# Altium PCB 1_ir-tara-f.PcbDoc (part 3 of 8)
Units mm, origin at the board's own origin, x right, y up, seen from the top; angles counter-clockwise.
Board outline 151 x 86.38 mm, 2 copper layers (Top Layer, Bottom Layer); 728 components, 20 nets, 2100 pads, 0 vias.
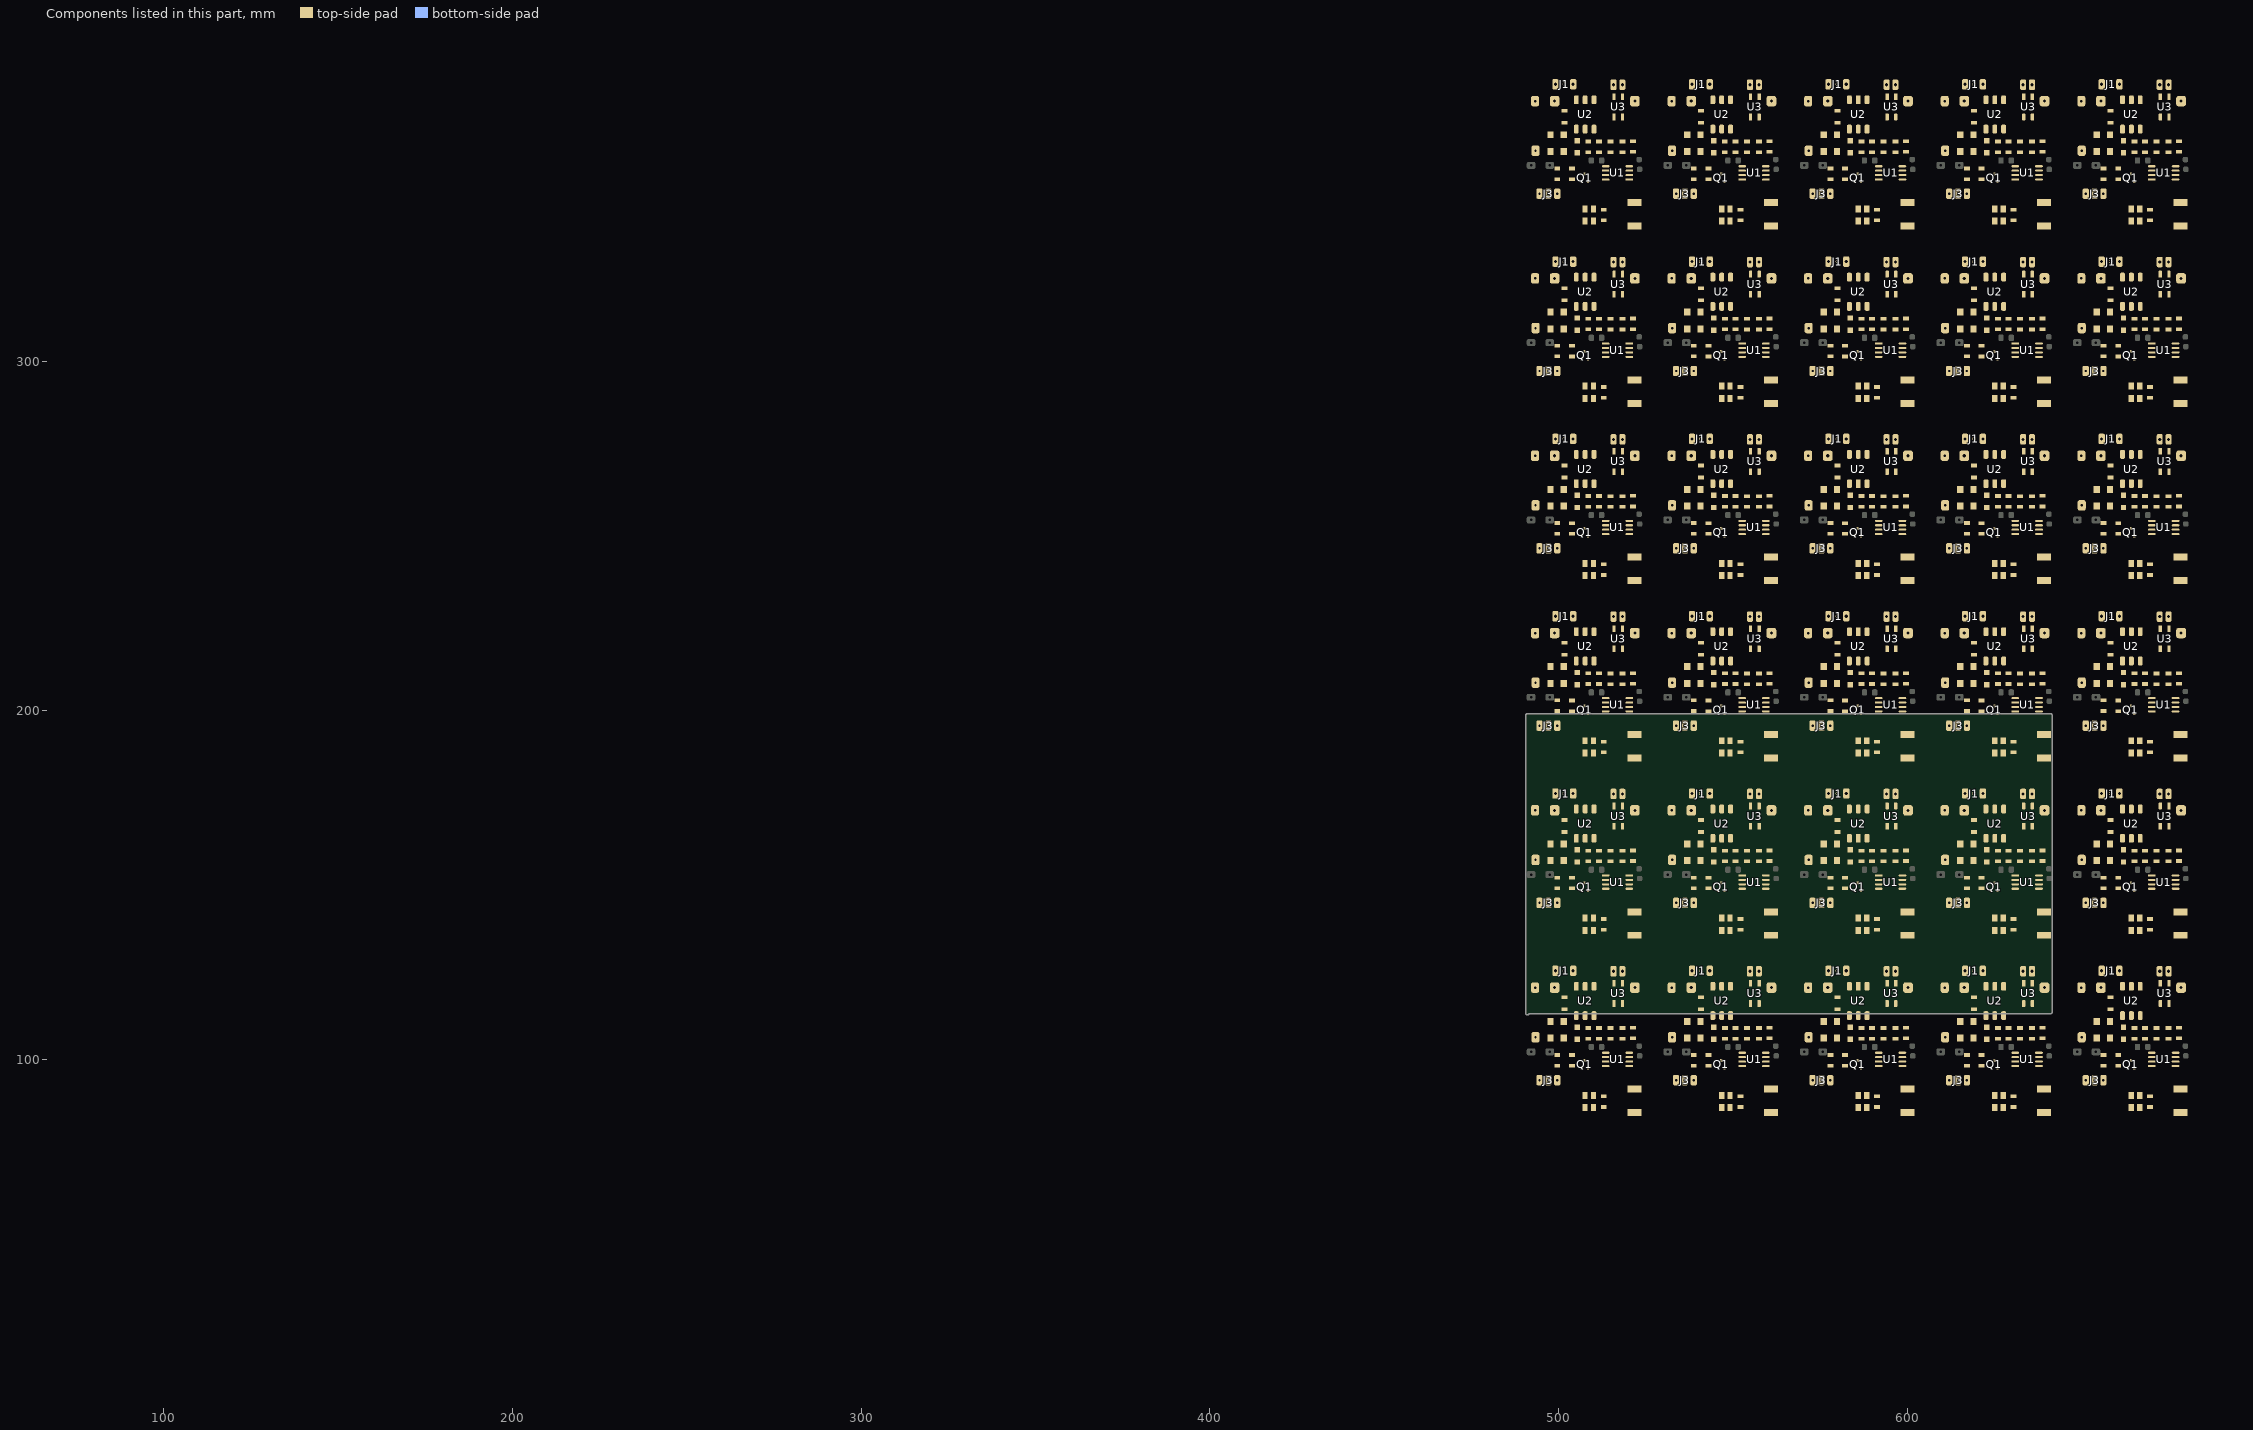
[diagram p3: the components of this part, seen from the top]

## Nets (pads, with @x,y where several pads share a name; then routed paths per layer and width w, separated by ;. In a path a pad name is that pad's centre, name@x,y a point inside that pad or via, vN(x,y) a via of type N, cw(c..) or ccw(c..) an arc to the next point about the centre after c; other vN are vias at no path point) (continued)
pads on no net: C1.1@521.846,120.588 C1.1@521.846,171.426 C1.1@521.846,222.265 C1.1@521.846,273.104 C1.1@521.846,323.942 C1.1@521.846,374.781 C1.1@561,120.588 C1.1@561,171.426 C1.1@561,222.265 C1.1@561,273.104 C1.1@561,323.942 C1.1@561,374.781 C1.1@600.155,120.588 C1.1@600.155,222.265 C1.1@600.155,273.104 C1.1@600.155,323.942 C1.1@600.155,374.781 C1.1@639.31,120.588 C1.1@639.31,171.426 C1.1@639.31,222.265 C1.1@639.31,273.104 C1.1@639.31,323.942 C1.1@639.31,374.781 C1.1@678.464,120.588 C1.1@678.464,171.426 C1.1@678.464,222.265 C1.1@678.464,273.104 C1.1@678.464,323.942 C1.1@678.464,374.781 C1.2@498.846,120.588 C1.2@498.846,171.426 C1.2@498.846,222.265 C1.2@498.846,273.104 C1.2@498.846,323.942 C1.2@498.846,374.781 C1.2@538,120.588 C1.2@538,171.426 C1.2@538,222.265 C1.2@538,273.104 C1.2@538,323.942 C1.2@538,374.781 C1.2@577.155,120.588 C1.2@577.155,222.265 C1.2@577.155,273.104 C1.2@577.155,323.942 C1.2@577.155,374.781 C1.2@616.31,120.588 C1.2@616.31,171.426 C1.2@616.31,222.265 C1.2@616.31,273.104 C1.2@616.31,323.942 C1.2@616.31,374.781 C1.2@655.464,120.588 C1.2@655.464,171.426 C1.2@655.464,222.265 C1.2@655.464,273.104 C1.2@655.464,323.942 C1.2@655.464,374.781 C2.1@508.477,105.974 C2.1@508.477,156.812 C2.1@508.477,207.651 C2.1@508.477,258.49 C2.1@508.477,309.328 C2.1@508.477,360.167 C2.1@547.631,105.974 C2.1@547.631,156.812 C2.1@547.631,207.651 C2.1@547.631,258.49 C2.1@547.631,309.328 C2.1@547.631,360.167 C2.1@586.786,105.974 C2.1@586.786,207.651 C2.1@586.786,258.49 C2.1@586.786,309.328 C2.1@586.786,360.167 C2.1@625.941,105.974 C2.1@625.941,156.812 C2.1@625.941,207.651 C2.1@625.941,258.49 C2.1@625.941,309.328 C2.1@625.941,360.167 C2.1@665.095,105.974 C2.1@665.095,156.812 C2.1@665.095,207.651 C2.1@665.095,258.49 C2.1@665.095,309.328 C2.1@665.095,360.167 C2.2@508.477,109.023 C2.2@508.477,159.862 C2.2@508.477,210.701 C2.2@508.477,261.539 C2.2@508.477,312.378 C2.2@508.477,363.216 C2.2@547.631,109.023 C2.2@547.631,159.862 C2.2@547.631,210.701 C2.2@547.631,261.539 C2.2@547.631,312.378 C2.2@547.631,363.216 C2.2@586.786,109.023 C2.2@586.786,210.701 C2.2@586.786,261.539 C2.2@586.786,312.378 C2.2@586.786,363.216 C2.2@625.941,109.023 C2.2@625.941,159.862 C2.2@625.941,210.701 C2.2@625.941,261.539 C2.2@625.941,312.378 C2.2@625.941,363.216 C2.2@665.095,109.023 C2.2@665.095,159.862 C2.2@665.095,210.701 C2.2@665.095,261.539 C2.2@665.095,312.378 C2.2@665.095,363.216 C3.1@511.525,105.974 C3.1@511.525,156.812 C3.1@511.525,207.651 C3.1@511.525,258.49 C3.1@511.525,309.328 C3.1@511.525,360.167 C3.1@550.679,105.974 C3.1@550.679,156.812 C3.1@550.679,207.651 C3.1@550.679,258.49 C3.1@550.679,309.328 C3.1@550.679,360.167 C3.1@589.834,105.974 C3.1@589.834,207.651 C3.1@589.834,258.49 C3.1@589.834,309.328 C3.1@589.834,360.167 C3.1@628.989,105.974 C3.1@628.989,156.812 C3.1@628.989,207.651 C3.1@628.989,258.49 C3.1@628.989,309.328 C3.1@628.989,360.167 C3.1@668.143,105.974 C3.1@668.143,156.812 C3.1@668.143,207.651 C3.1@668.143,258.49 C3.1@668.143,309.328 C3.1@668.143,360.167 C3.2@511.525,109.024 C3.2@511.525,159.862 C3.2@511.525,210.701 C3.2@511.525,261.54 C3.2@511.525,312.378 C3.2@511.525,363.217 C3.2@550.679,109.024 C3.2@550.679,159.862 C3.2@550.679,210.701 C3.2@550.679,261.54 C3.2@550.679,312.378 C3.2@550.679,363.217 C3.2@589.834,109.024 C3.2@589.834,210.701 C3.2@589.834,261.54 C3.2@589.834,312.378 C3.2@589.834,363.217 C3.2@628.989,109.024 C3.2@628.989,159.862 C3.2@628.989,210.701 C3.2@628.989,261.54 C3.2@628.989,312.378 C3.2@628.989,363.217 C3.2@668.143,109.024 C3.2@668.143,159.862 C3.2@668.143,210.701 C3.2@668.143,261.54 C3.2@668.143,312.378 C3.2@668.143,363.217 C4.1@521.304,109.094 C4.1@521.304,159.933 C4.1@521.304,210.772 C4.1@521.304,261.61 C4.1@521.304,312.449 C4.1@521.304,363.287 C4.1@560.458,109.094 C4.1@560.458,159.933 C4.1@560.458,210.772 C4.1@560.458,261.61 C4.1@560.458,312.449 C4.1@560.458,363.287 C4.1@599.613,109.094 C4.1@599.613,210.772 C4.1@599.613,261.61 C4.1@599.613,312.449 C4.1@599.613,363.287 C4.1@638.768,109.094 C4.1@638.768,159.933 C4.1@638.768,210.772 C4.1@638.768,261.61 C4.1@638.768,312.449 C4.1@638.768,363.287 C4.1@677.922,109.094 C4.1@677.922,159.933 C4.1@677.922,210.772 C4.1@677.922,261.61 C4.1@677.922,312.449 C4.1@677.922,363.287 C4.2@521.304,106.045 C4.2@521.304,156.883 C4.2@521.304,207.722 C4.2@521.304,258.561 C4.2@521.304,309.399 C4.2@521.304,360.238 C4.2@560.458,106.045 C4.2@560.458,156.883 C4.2@560.458,207.722 C4.2@560.458,258.561 C4.2@560.458,309.399 C4.2@560.458,360.238 C4.2@599.613,106.045 C4.2@599.613,207.722 C4.2@599.613,258.561 C4.2@599.613,309.399 C4.2@599.613,360.238 C4.2@638.768,106.045 C4.2@638.768,156.883 C4.2@638.768,207.722 C4.2@638.768,258.561 C4.2@638.768,309.399 C4.2@638.768,360.238 C4.2@677.922,106.045 C4.2@677.922,156.883 C4.2@677.922,207.722 C4.2@677.922,258.561 C4.2@677.922,309.399 C4.2@677.922,360.238 D1.1@507.588,89.699 D1.1@507.588,140.537 D1.1@507.588,191.376 D1.1@507.588,242.215 D1.1@507.588,293.053 D1.1@507.588,343.892 D1.1@546.742,89.699 D1.1@546.742,140.537 D1.1@546.742,191.376 D1.1@546.742,242.215 D1.1@546.742,293.053 D1.1@546.742,343.892 D1.1@585.897,89.699 D1.1@585.897,191.376 D1.1@585.897,242.215 D1.1@585.897,293.053 D1.1@585.897,343.892 D1.1@625.052,89.699 D1.1@625.052,140.537 D1.1@625.052,191.376 D1.1@625.052,242.215 D1.1@625.052,293.053 D1.1@625.052,343.892 D1.1@664.206,89.699 D1.1@664.206,140.537 D1.1@664.206,191.376 D1.1@664.206,242.215 D1.1@664.206,293.053 D1.1@664.206,343.892 D1.2@507.588,86.199 D1.2@507.588,137.037 D1.2@507.588,187.876 D1.2@507.588,238.715 D1.2@507.588,289.553 D1.2@507.588,340.392 D1.2@546.742,86.199 D1.2@546.742,137.037 D1.2@546.742,187.876 D1.2@546.742,238.715 D1.2@546.742,289.553 D1.2@546.742,340.392 D1.2@585.897,86.199 D1.2@585.897,187.876 D1.2@585.897,238.715 D1.2@585.897,289.553 D1.2@585.897,340.392 D1.2@625.052,86.199 D1.2@625.052,137.037 D1.2@625.052,187.876 D1.2@625.052,238.715 D1.2@625.052,289.553 D1.2@625.052,340.392 D1.2@664.206,86.199 D1.2@664.206,137.037 D1.2@664.206,187.876 D1.2@664.206,238.715 D1.2@664.206,289.553 D1.2@664.206,340.392 D2.1@510.001,89.699 D2.1@510.001,140.537 D2.1@510.001,191.376 D2.1@510.001,242.215 D2.1@510.001,293.053 D2.1@510.001,343.892 D2.1@549.155,89.699 D2.1@549.155,140.537 D2.1@549.155,191.376 D2.1@549.155,242.215 D2.1@549.155,293.053 D2.1@549.155,343.892 D2.1@588.31,89.699 D2.1@588.31,191.376 D2.1@588.31,242.215 D2.1@588.31,293.053 D2.1@588.31,343.892 D2.1@627.465,89.699 D2.1@627.465,140.537 D2.1@627.465,191.376 D2.1@627.465,242.215 D2.1@627.465,293.053 D2.1@627.465,343.892 D2.1@666.619,89.699 D2.1@666.619,140.537 D2.1@666.619,191.376 D2.1@666.619,242.215 D2.1@666.619,293.053 D2.1@666.619,343.892 D2.2@510.001,86.199 D2.2@510.001,137.037 D2.2@510.001,187.876 D2.2@510.001,238.715 D2.2@510.001,289.553 D2.2@510.001,340.392 D2.2@549.155,86.199 D2.2@549.155,137.037 D2.2@549.155,187.876 D2.2@549.155,238.715 D2.2@549.155,289.553 D2.2@549.155,340.392 D2.2@588.31,86.199 D2.2@588.31,187.876 D2.2@588.31,238.715 D2.2@588.31,289.553 D2.2@588.31,340.392 D2.2@627.465,86.199 D2.2@627.465,137.037 D2.2@627.465,187.876 D2.2@627.465,238.715 D2.2@627.465,289.553 D2.2@627.465,340.392 D2.2@666.619,86.199 D2.2@666.619,137.037 D2.2@666.619,187.876 D2.2@666.619,238.715 D2.2@666.619,289.553 D2.2@666.619,340.392 D3.1@501.492,110.946 D3.1@501.492,161.784 D3.1@501.492,212.623 D3.1@501.492,263.462 D3.1@501.492,314.3 D3.1@501.492,365.139 D3.1@540.646,110.946 D3.1@540.646,161.784 D3.1@540.646,212.623 D3.1@540.646,263.462 D3.1@540.646,314.3 D3.1@540.646,365.139 D3.1@579.801,110.946 D3.1@579.801,212.623 D3.1@579.801,263.462 D3.1@579.801,314.3 D3.1@579.801,365.139 D3.1@618.956,110.946 D3.1@618.956,161.784 D3.1@618.956,212.623 D3.1@618.956,263.462 D3.1@618.956,314.3 D3.1@618.956,365.139 D3.1@658.11,110.946 D3.1@658.11,161.784 D3.1@658.11,212.623 D3.1@658.11,263.462 D3.1@658.11,314.3 D3.1@658.11,365.139 D3.2@501.492,106.146 D3.2@501.492,156.984 D3.2@501.492,207.823 D3.2@501.492,258.662 D3.2@501.492,309.5 D3.2@501.492,360.339 D3.2@540.646,106.146 D3.2@540.646,156.984 D3.2@540.646,207.823 D3.2@540.646,258.662 D3.2@540.646,309.5 D3.2@540.646,360.339 D3.2@579.801,106.146 D3.2@579.801,207.823 D3.2@579.801,258.662 D3.2@579.801,309.5 D3.2@579.801,360.339 D3.2@618.956,106.146 D3.2@618.956,156.984 D3.2@618.956,207.823 D3.2@618.956,258.662 D3.2@618.956,309.5 D3.2@618.956,360.339 D3.2@658.11,106.146 D3.2@658.11,156.984 D3.2@658.11,207.823 D3.2@658.11,258.662 D3.2@658.11,309.5 D3.2@658.11,360.339 D4.1@497.682,110.946 D4.1@497.682,161.784 D4.1@497.682,212.623 D4.1@497.682,263.462 D4.1@497.682,314.3 D4.1@497.682,365.139 D4.1@536.836,110.946 D4.1@536.836,161.784 D4.1@536.836,212.623 D4.1@536.836,263.462 D4.1@536.836,314.3 D4.1@536.836,365.139 D4.1@575.991,110.946 D4.1@575.991,212.623 D4.1@575.991,263.462 D4.1@575.991,314.3 D4.1@575.991,365.139 D4.1@615.146,110.946 D4.1@615.146,161.784 D4.1@615.146,212.623 D4.1@615.146,263.462 D4.1@615.146,314.3 D4.1@615.146,365.139 D4.1@654.3,110.946 D4.1@654.3,161.784 D4.1@654.3,212.623 D4.1@654.3,263.462 D4.1@654.3,314.3 D4.1@654.3,365.139 D4.2@497.682,106.146 D4.2@497.682,156.984 D4.2@497.682,207.823 D4.2@497.682,258.662 D4.2@497.682,309.5 D4.2@497.682,360.339 D4.2@536.836,106.146 D4.2@536.836,156.984 D4.2@536.836,207.823 D4.2@536.836,258.662 D4.2@536.836,309.5 D4.2@536.836,360.339 D4.2@575.991,106.146 D4.2@575.991,207.823 D4.2@575.991,258.662 D4.2@575.991,309.5 D4.2@575.991,360.339 D4.2@615.146,106.146 D4.2@615.146,156.984 D4.2@615.146,207.823 D4.2@615.146,258.662 D4.2@615.146,309.5 D4.2@615.146,360.339 D4.2@654.3,106.146 D4.2@654.3,156.984 D4.2@654.3,207.823 D4.2@654.3,258.662 D4.2@654.3,309.5 D4.2@654.3,360.339 D5.1@505.302,109.257 D5.1@505.302,160.095 D5.1@505.302,210.934 D5.1@505.302,261.773 D5.1@505.302,312.611 D5.1@505.302,363.45 D5.1@544.456,109.257 D5.1@544.456,160.095 D5.1@544.456,210.934 D5.1@544.456,261.773 D5.1@544.456,312.611 D5.1@544.456,363.45 D5.1@583.611,109.257 D5.1@583.611,210.934 D5.1@583.611,261.773 D5.1@583.611,312.611 D5.1@583.611,363.45 D5.1@622.766,109.257 D5.1@622.766,160.095 D5.1@622.766,210.934 D5.1@622.766,261.773 D5.1@622.766,312.611 D5.1@622.766,363.45 D5.1@661.92,109.257 D5.1@661.92,160.095 D5.1@661.92,210.934 D5.1@661.92,261.773 D5.1@661.92,312.611 D5.1@661.92,363.45 D5.2@505.302,105.757 D5.2@505.302,156.595 D5.2@505.302,207.434 D5.2@505.302,258.273 D5.2@505.302,309.111 D5.2@505.302,359.95 D5.2@544.456,105.757 D5.2@544.456,156.595 D5.2@544.456,207.434 D5.2@544.456,258.273 D5.2@544.456,309.111 D5.2@544.456,359.95 D5.2@583.611,105.757 D5.2@583.611,207.434 D5.2@583.611,258.273 D5.2@583.611,309.111 D5.2@583.611,359.95 D5.2@622.766,105.757 D5.2@622.766,156.595 D5.2@622.766,207.434 D5.2@622.766,258.273 D5.2@622.766,309.111 D5.2@622.766,359.95 D5.2@661.92,105.757 D5.2@661.92,156.595 D5.2@661.92,207.434 D5.2@661.92,258.273 D5.2@661.92,309.111 D5.2@661.92,359.95 D6.1@521.685,84.774 D6.1@521.685,135.612 D6.1@521.685,186.451 D6.1@521.685,237.29 D6.1@521.685,288.128 D6.1@521.685,338.967 D6.1@560.839,84.774 D6.1@560.839,135.612 D6.1@560.839,186.451 D6.1@560.839,237.29 D6.1@560.839,288.128 D6.1@560.839,338.967 D6.1@599.994,84.774 D6.1@599.994,186.451 D6.1@599.994,237.29 D6.1@599.994,288.128 D6.1@599.994,338.967 D6.1@639.149,84.774 D6.1@639.149,135.612 D6.1@639.149,186.451 D6.1@639.149,237.29 D6.1@639.149,288.128 D6.1@639.149,338.967 D6.1@678.303,84.774 D6.1@678.303,135.612 D6.1@678.303,186.451 D6.1@678.303,237.29 D6.1@678.303,288.128 D6.1@678.303,338.967 D6.2@521.685,91.505 D6.2@521.685,142.343 D6.2@521.685,193.182 D6.2@521.685,244.021 D6.2@521.685,294.859 D6.2@521.685,345.698 D6.2@560.839,91.505 D6.2@560.839,142.343 D6.2@560.839,193.182 D6.2@560.839,244.021 D6.2@560.839,294.859 D6.2@560.839,345.698 D6.2@599.994,91.505 D6.2@599.994,193.182 D6.2@599.994,244.021 D6.2@599.994,294.859 D6.2@599.994,345.698 D6.2@639.149,91.505 D6.2@639.149,142.343 D6.2@639.149,193.182 D6.2@639.149,244.021 D6.2@639.149,294.859 D6.2@639.149,345.698 D6.2@678.303,91.505 D6.2@678.303,142.343 D6.2@678.303,193.182 D6.2@678.303,244.021 D6.2@678.303,294.859 D6.2@678.303,345.698 J1.1@499.079,125.414 J1.1@499.079,176.252 J1.1@499.079,227.091 J1.1@499.079,277.93 J1.1@499.079,328.768 J1.1@499.079,379.607 J1.1@538.233,125.414 J1.1@538.233,176.252 J1.1@538.233,227.091 J1.1@538.233,277.93 J1.1@538.233,328.768 J1.1@538.233,379.607 J1.1@577.388,125.414 J1.1@577.388,227.091 J1.1@577.388,277.93 J1.1@577.388,328.768 J1.1@577.388,379.607 J1.1@616.543,125.414 J1.1@616.543,176.252 J1.1@616.543,227.091 J1.1@616.543,277.93 J1.1@616.543,328.768 J1.1@616.543,379.607 J1.1@655.697,125.414 J1.1@655.697,176.252 J1.1@655.697,227.091 J1.1@655.697,277.93 J1.1@655.697,328.768 J1.1@655.697,379.607 J1.2 J1.3@504.159,125.414 J1.3@504.159,176.252 J1.3@504.159,227.091 J1.3@504.159,277.93 J1.3@504.159,328.768 J1.3@504.159,379.607 J1.3@543.313,125.414 J1.3@543.313,176.252 J1.3@543.313,227.091 J1.3@543.313,277.93 J1.3@543.313,328.768 J1.3@543.313,379.607 J1.3@582.468,125.414 J1.3@582.468,227.091 J1.3@582.468,277.93 J1.3@582.468,328.768 J1.3@582.468,379.607 J1.3@621.623,125.414 J1.3@621.623,176.252 J1.3@621.623,227.091 J1.3@621.623,277.93 J1.3@621.623,328.768 J1.3@621.623,379.607 J1.3@660.777,125.414 J1.3@660.777,176.252 J1.3@660.777,227.091 J1.3@660.777,277.93 J1.3@660.777,328.768 J1.3@660.777,379.607 J2.1@515.716,125.287 J2.1@515.716,176.125 J2.1@515.716,226.964 J2.1@515.716,277.803 J2.1@515.716,328.641 J2.1@515.716,379.48 J2.1@554.87,125.287 J2.1@554.87,176.125 J2.1@554.87,226.964 J2.1@554.87,277.803 J2.1@554.87,328.641 J2.1@554.87,379.48 J2.1@594.025,125.287 J2.1@594.025,226.964 J2.1@594.025,277.803 J2.1@594.025,328.641 J2.1@594.025,379.48 J2.1@633.18,125.287 J2.1@633.18,176.125 J2.1@633.18,226.964 J2.1@633.18,277.803 J2.1@633.18,328.641 J2.1@633.18,379.48 J2.1@672.334,125.287 J2.1@672.334,176.125 J2.1@672.334,226.964 J2.1@672.334,277.803 J2.1@672.334,328.641 J2.1@672.334,379.48 J2.2@518.256,125.287 J2.2@518.256,176.125 J2.2@518.256,226.964 J2.2@518.256,277.803 J2.2@518.256,328.641 J2.2@518.256,379.48 J2.2@557.41,125.287 J2.2@557.41,176.125 J2.2@557.41,226.964 J2.2@557.41,277.803 J2.2@557.41,328.641 J2.2@557.41,379.48 J2.2@596.565,125.287 J2.2@596.565,226.964 J2.2@596.565,277.803 J2.2@596.565,328.641 J2.2@596.565,379.48 J2.2@635.72,125.287 J2.2@635.72,176.125 J2.2@635.72,226.964 J2.2@635.72,277.803 J2.2@635.72,328.641 J2.2@635.72,379.48 J2.2@674.874,125.287 J2.2@674.874,176.125 J2.2@674.874,226.964 J2.2@674.874,277.803 J2.2@674.874,328.641 J2.2@674.874,379.48 J3.1@494.507,94.045 J3.1@494.507,144.883 J3.1@494.507,195.722 J3.1@494.507,246.561 J3.1@494.507,297.399 J3.1@494.507,348.238 J3.1@533.661,94.045 J3.1@533.661,144.883 J3.1@533.661,195.722 J3.1@533.661,246.561 J3.1@533.661,297.399 J3.1@533.661,348.238 J3.1@572.816,94.045 J3.1@572.816,195.722 J3.1@572.816,246.561 J3.1@572.816,297.399 J3.1@572.816,348.238 J3.1@611.971,94.045 J3.1@611.971,144.883 J3.1@611.971,195.722 J3.1@611.971,246.561 J3.1@611.971,297.399 J3.1@611.971,348.238 J3.1@651.125,94.045 J3.1@651.125,144.883 J3.1@651.125,195.722 J3.1@651.125,246.561 J3.1@651.125,297.399 J3.1@651.125,348.238 J3.2@497.047,94.045 J3.2@497.047,144.883 J3.2@497.047,195.722 J3.2@497.047,246.561 J3.2@497.047,297.399 J3.2@497.047,348.238 J3.2@536.201,94.045 J3.2@536.201,144.883 J3.2@536.201,195.722 J3.2@536.201,246.561 J3.2@536.201,297.399 J3.2@536.201,348.238 J3.2@575.356,94.045 J3.2@575.356,195.722 J3.2@575.356,246.561 J3.2@575.356,297.399 J3.2@575.356,348.238 J3.2@614.511,94.045 J3.2@614.511,144.883 J3.2@614.511,195.722 J3.2@614.511,246.561 J3.2@614.511,297.399 J3.2@614.511,348.238 J3.2@653.665,94.045 J3.2@653.665,144.883 J3.2@653.665,195.722 J3.2@653.665,246.561 J3.2@653.665,297.399 J3.2@653.665,348.238 J3.3@499.587,94.045 J3.3@499.587,144.883 J3.3@499.587,195.722 J3.3@499.587,246.561 J3.3@499.587,297.399 J3.3@499.587,348.238 J3.3@538.741,94.045 J3.3@538.741,144.883 J3.3@538.741,195.722 J3.3@538.741,246.561 J3.3@538.741,297.399 J3.3@538.741,348.238 J3.3@577.896,94.045 J3.3@577.896,195.722 J3.3@577.896,246.561 J3.3@577.896,297.399 J3.3@577.896,348.238 J3.3@617.051,94.045 J3.3@617.051,144.883 J3.3@617.051,195.722 J3.3@617.051,246.561 J3.3@617.051,297.399 J3.3@617.051,348.238 J3.3@656.205,94.045 J3.3@656.205,144.883 J3.3@656.205,195.722 J3.3@656.205,246.561 J3.3@656.205,297.399 J3.3@656.205,348.238 Q1.1@506.511,97.542 Q1.1@506.511,148.38 Q1.1@506.511,199.219 Q1.1@506.511,250.058 Q1.1@506.511,300.896 Q1.1@506.511,351.735 Q1.1@545.665,97.542 Q1.1@545.665,148.38 Q1.1@545.665,199.219 Q1.1@545.665,250.058 Q1.1@545.665,300.896 Q1.1@545.665,351.735 Q1.1@584.82,97.542 Q1.1@584.82,199.219 Q1.1@584.82,250.058 Q1.1@584.82,300.896 Q1.1@584.82,351.735 Q1.1@623.975,97.542 Q1.1@623.975,148.38 Q1.1@623.975,199.219 Q1.1@623.975,250.058 Q1.1@623.975,300.896 Q1.1@623.975,351.735 Q1.1@663.129,97.542 Q1.1@663.129,148.38 Q1.1@663.129,199.219 Q1.1@663.129,250.058 Q1.1@663.129,300.896 Q1.1@663.129,351.735 Q1.2@508.411,97.542 Q1.2@508.411,148.38 Q1.2@508.411,199.219 Q1.2@508.411,250.058 Q1.2@508.411,300.896 Q1.2@508.411,351.735 Q1.2@547.565,97.542 Q1.2@547.565,148.38 Q1.2@547.565,199.219 Q1.2@547.565,250.058 Q1.2@547.565,300.896 Q1.2@547.565,351.735 Q1.2@586.72,97.542 Q1.2@586.72,199.219 Q1.2@586.72,250.058 Q1.2@586.72,300.896 Q1.2@586.72,351.735 Q1.2@625.875,97.542 Q1.2@625.875,148.38 Q1.2@625.875,199.219 Q1.2@625.875,250.058 Q1.2@625.875,300.896 Q1.2@625.875,351.735 Q1.2@665.029,97.542 Q1.2@665.029,148.38 Q1.2@665.029,199.219 Q1.2@665.029,250.058 Q1.2@665.029,300.896 Q1.2@665.029,351.735 Q1.3@507.461,99.692 Q1.3@507.461,150.53 Q1.3@507.461,201.369 Q1.3@507.461,252.208 Q1.3@507.461,303.046 Q1.3@507.461,353.885 Q1.3@546.615,99.692 Q1.3@546.615,150.53 Q1.3@546.615,201.369 Q1.3@546.615,252.208 Q1.3@546.615,303.046 Q1.3@546.615,353.885 Q1.3@585.77,99.692 Q1.3@585.77,201.369 Q1.3@585.77,252.208 Q1.3@585.77,303.046 Q1.3@585.77,353.885 Q1.3@624.925,99.692 Q1.3@624.925,150.53 Q1.3@624.925,201.369 Q1.3@624.925,252.208 Q1.3@624.925,303.046 Q1.3@624.925,353.885 Q1.3@664.079,99.692 Q1.3@664.079,150.53 Q1.3@664.079,201.369 Q1.3@664.079,252.208 Q1.3@664.079,303.046 Q1.3@664.079,353.885 R1.1@512.922,86.385 R1.1@512.922,137.224 R1.1@512.922,188.062 R1.1@512.922,238.901 R1.1@512.922,289.74 R1.1@512.922,340.578 R1.1@552.076,86.385 R1.1@552.076,137.224 R1.1@552.076,188.062 R1.1@552.076,238.901 R1.1@552.076,289.74 R1.1@552.076,340.578 R1.1@591.231,86.385 R1.1@591.231,188.062 R1.1@591.231,238.901 R1.1@591.231,289.74 R1.1@591.231,340.578 R1.1@630.386,86.385 R1.1@630.386,137.224 R1.1@630.386,188.062 R1.1@630.386,238.901 R1.1@630.386,289.74 R1.1@630.386,340.578 R1.1@669.54,86.385 R1.1@669.54,137.224 R1.1@669.54,188.062 R1.1@669.54,238.901 R1.1@669.54,289.74 R1.1@669.54,340.578 R1.2@512.922,89.435 R1.2@512.922,140.273 R1.2@512.922,191.112 R1.2@512.922,241.951 R1.2@512.922,292.789 R1.2@512.922,343.628 R1.2@552.076,89.435 R1.2@552.076,140.273 R1.2@552.076,191.112 R1.2@552.076,241.951 R1.2@552.076,292.789 R1.2@552.076,343.628 R1.2@591.231,89.435 R1.2@591.231,191.112 R1.2@591.231,241.951 R1.2@591.231,292.789 R1.2@591.231,343.628 R1.2@630.386,89.435 R1.2@630.386,140.273 R1.2@630.386,191.112 R1.2@630.386,241.951 R1.2@630.386,292.789 R1.2@630.386,343.628 R1.2@669.54,89.435 R1.2@669.54,140.273 R1.2@669.54,191.112 R1.2@669.54,241.951 R1.2@669.54,292.789 R1.2@669.54,343.628 R2.1@501.619,117.803 R2.1@501.619,168.641 R2.1@501.619,219.48 R2.1@501.619,270.319 R2.1@501.619,321.157 R2.1@501.619,371.996 R2.1@540.773,117.803 R2.1@540.773,168.641 R2.1@540.773,219.48 R2.1@540.773,270.319 R2.1@540.773,321.157 R2.1@540.773,371.996 R2.1@579.928,117.803 R2.1@579.928,219.48 R2.1@579.928,270.319 R2.1@579.928,321.157 R2.1@579.928,371.996 R2.1@619.083,117.803 R2.1@619.083,168.641 R2.1@619.083,219.48 R2.1@619.083,270.319 R2.1@619.083,321.157 R2.1@619.083,371.996 R2.1@658.237,117.803 R2.1@658.237,168.641 R2.1@658.237,219.48 R2.1@658.237,270.319 R2.1@658.237,321.157 R2.1@658.237,371.996 R2.2@501.619,114.365 R2.2@501.619,165.203 R2.2@501.619,216.042 R2.2@501.619,266.881 R2.2@501.619,317.719 R2.2@501.619,368.558 R2.2@540.773,114.365 R2.2@540.773,165.203 R2.2@540.773,216.042 R2.2@540.773,266.881 R2.2@540.773,317.719 R2.2@540.773,368.558 R2.2@579.928,114.365 R2.2@579.928,216.042 R2.2@579.928,266.881 R2.2@579.928,317.719 R2.2@579.928,368.558 R2.2@619.083,114.365 R2.2@619.083,165.203 R2.2@619.083,216.042 R2.2@619.083,266.881 R2.2@619.083,317.719 R2.2@619.083,368.558 R2.2@658.237,114.365 R2.2@658.237,165.203 R2.2@658.237,216.042 R2.2@658.237,266.881 R2.2@658.237,317.719 R2.2@658.237,368.558 R3.1@493.237,120.588 R3.1@493.237,171.426 R3.1@493.237,222.265 R3.1@493.237,273.104 R3.1@493.237,323.942 R3.1@493.237,374.781 R3.1@532.391,120.588 R3.1@532.391,171.426 R3.1@532.391,222.265 R3.1@532.391,273.104 R3.1@532.391,323.942 R3.1@532.391,374.781 R3.1@571.546,120.588 R3.1@571.546,222.265 R3.1@571.546,273.104 R3.1@571.546,323.942 R3.1@571.546,374.781 R3.1@610.701,120.588 R3.1@610.701,171.426 R3.1@610.701,222.265 R3.1@610.701,273.104 R3.1@610.701,323.942 R3.1@610.701,374.781 R3.1@649.855,120.588 R3.1@649.855,171.426 R3.1@649.855,222.265 R3.1@649.855,273.104 R3.1@649.855,323.942 R3.1@649.855,374.781 R3.2@493.364,106.364 R3.2@493.364,157.202 R3.2@493.364,208.041 R3.2@493.364,258.88 R3.2@493.364,309.718 R3.2@493.364,360.557 R3.2@532.518,106.364 R3.2@532.518,157.202 R3.2@532.518,208.041 R3.2@532.518,258.88 R3.2@532.518,309.718 R3.2@532.518,360.557 R3.2@571.673,106.364 R3.2@571.673,208.041 R3.2@571.673,258.88 R3.2@571.673,309.718 R3.2@571.673,360.557 R3.2@610.828,106.364 R3.2@610.828,157.202 R3.2@610.828,208.041 R3.2@610.828,258.88 R3.2@610.828,309.718 R3.2@610.828,360.557 R3.2@649.982,106.364 R3.2@649.982,157.202 R3.2@649.982,208.041 R3.2@649.982,258.88 R3.2@649.982,309.718 R3.2@649.982,360.557 R6.1@514.827,108.993 R6.1@514.827,159.831 R6.1@514.827,210.67 R6.1@514.827,261.509 R6.1@514.827,312.347 R6.1@514.827,363.186 R6.1@553.981,108.993 R6.1@553.981,159.831 R6.1@553.981,210.67 R6.1@553.981,261.509 R6.1@553.981,312.347 R6.1@553.981,363.186 R6.1@593.136,108.993 R6.1@593.136,210.67 R6.1@593.136,261.509 R6.1@593.136,312.347 R6.1@593.136,363.186 R6.1@632.291,108.993 R6.1@632.291,159.831 R6.1@632.291,210.67 R6.1@632.291,261.509 R6.1@632.291,312.347 R6.1@632.291,363.186 R6.1@671.445,108.993 R6.1@671.445,159.831 R6.1@671.445,210.67 R6.1@671.445,261.509 R6.1@671.445,312.347 R6.1@671.445,363.186 R6.2@514.827,105.943 R6.2@514.827,156.782 R6.2@514.827,207.62 R6.2@514.827,258.459 R6.2@514.827,309.298 R6.2@514.827,360.136 R6.2@553.981,105.943 R6.2@553.981,156.782 R6.2@553.981,207.62 R6.2@553.981,258.459 R6.2@553.981,309.298 R6.2@553.981,360.136 R6.2@593.136,105.943 R6.2@593.136,207.62 R6.2@593.136,258.459 R6.2@593.136,309.298 R6.2@593.136,360.136 R6.2@632.291,105.943 R6.2@632.291,156.782 R6.2@632.291,207.62 R6.2@632.291,258.459 R6.2@632.291,309.298 R6.2@632.291,360.136 R6.2@671.445,105.943 R6.2@671.445,156.782 R6.2@671.445,207.62 R6.2@671.445,258.459 R6.2@671.445,309.298 R6.2@671.445,360.136 R7.1@499.587,98.227 R7.1@499.587,149.065 R7.1@499.587,199.904 R7.1@499.587,250.743 R7.1@499.587,301.581 R7.1@499.587,352.42 R7.1@538.741,98.227 R7.1@538.741,149.065 R7.1@538.741,199.904 R7.1@538.741,250.743 R7.1@538.741,301.581 R7.1@538.741,352.42 R7.1@577.896,98.227 R7.1@577.896,199.904 R7.1@577.896,250.743 R7.1@577.896,301.581 R7.1@577.896,352.42 R7.1@617.051,98.227 R7.1@617.051,149.065 R7.1@617.051,199.904 R7.1@617.051,250.743 R7.1@617.051,301.581 R7.1@617.051,352.42 R7.1@656.205,98.227 R7.1@656.205,149.065 R7.1@656.205,199.904 R7.1@656.205,250.743 R7.1@656.205,301.581 R7.1@656.205,352.42 R7.2@499.587,101.277 R7.2@499.587,152.115 R7.2@499.587,202.954 R7.2@499.587,253.793 R7.2@499.587,304.631 R7.2@499.587,355.47 R7.2@538.741,101.277 R7.2@538.741,152.115 R7.2@538.741,202.954 R7.2@538.741,253.793 R7.2@538.741,304.631 R7.2@538.741,355.47 R7.2@577.896,101.277 R7.2@577.896,202.954 R7.2@577.896,253.793 R7.2@577.896,304.631 R7.2@577.896,355.47 R7.2@617.051,101.277 R7.2@617.051,152.115 R7.2@617.051,202.954 R7.2@617.051,253.793 R7.2@617.051,304.631 R7.2@617.051,355.47 R7.2@656.205,101.277 R7.2@656.205,152.115 R7.2@656.205,202.954 R7.2@656.205,253.793 R7.2@656.205,304.631 R7.2@656.205,355.47 R8.1@503.833,101.256 R8.1@503.833,152.095 R8.1@503.833,202.934 R8.1@503.833,253.772 R8.1@503.833,304.611 R8.1@503.833,355.45 R8.1@542.988,101.256 R8.1@542.988,152.095 R8.1@542.988,202.934 R8.1@542.988,253.772 R8.1@542.988,304.611 R8.1@542.988,355.45 R8.1@582.142,101.256 R8.1@582.142,202.934 R8.1@582.142,253.772 R8.1@582.142,304.611 R8.1@582.142,355.45 R8.1@621.297,101.256 R8.1@621.297,152.095 R8.1@621.297,202.934 R8.1@621.297,253.772 R8.1@621.297,304.611 R8.1@621.297,355.45 R8.1@660.451,355.45 R8.1@660.452,101.256 R8.1@660.452,152.095 R8.1@660.452,202.934 R8.1@660.452,253.772 R8.1@660.452,304.611 R8.2@503.833,98.206 R8.2@503.833,149.045 R8.2@503.833,199.884 R8.2@503.833,250.722 R8.2@503.833,301.561 R8.2@503.833,352.4 R8.2@542.988,98.206 R8.2@542.988,149.045 R8.2@542.988,199.884 R8.2@542.988,250.722 R8.2@542.988,301.561 R8.2@542.988,352.4 R8.2@582.142,98.206 R8.2@582.142,199.884 R8.2@582.142,250.722 R8.2@582.142,301.561 R8.2@582.142,352.4 R8.2@621.297,98.206 R8.2@621.297,149.045 R8.2@621.297,199.884 R8.2@621.297,250.722 R8.2@621.297,301.561 R8.2@621.297,352.4 R8.2@660.451,352.4 R8.2@660.452,98.206 R8.2@660.452,149.045 R8.2@660.452,199.884 R8.2@660.452,250.722 R8.2@660.452,301.561 R9.1@518.256,108.993 R9.1@518.256,159.831 R9.1@518.256,210.67 R9.1@518.256,261.509 R9.1@518.256,312.347 R9.1@518.256,363.186 R9.1@557.41,108.993 R9.1@557.41,159.831 R9.1@557.41,210.67 R9.1@557.41,261.509 R9.1@557.41,312.347 R9.1@557.41,363.186 R9.1@596.565,108.993 R9.1@596.565,210.67 R9.1@596.565,261.509 R9.1@596.565,312.347 R9.1@596.565,363.186 R9.1@635.72,108.993 R9.1@635.72,159.831 R9.1@635.72,210.67 R9.1@635.72,261.509 R9.1@635.72,312.347 R9.1@635.72,363.186 R9.1@674.874,108.993 R9.1@674.874,159.831 R9.1@674.874,210.67 R9.1@674.874,261.509 R9.1@674.874,312.347 R9.1@674.874,363.186 R9.2@518.256,105.943 R9.2@518.256,156.782 R9.2@518.256,207.62 R9.2@518.256,258.459 R9.2@518.256,309.298 R9.2@518.256,360.136 R9.2@557.41,105.943 R9.2@557.41,156.782 R9.2@557.41,207.62 R9.2@557.41,258.459 R9.2@557.41,309.298 R9.2@557.41,360.136 R9.2@596.565,105.943 R9.2@596.565,207.62 R9.2@596.565,258.459 R9.2@596.565,309.298 R9.2@596.565,360.136 R9.2@635.72,105.943 R9.2@635.72,156.782 R9.2@635.72,207.62 R9.2@635.72,258.459 R9.2@635.72,309.298 R9.2@635.72,360.136 R9.2@674.874,105.943 R9.2@674.874,156.782 R9.2@674.874,207.62 R9.2@674.874,258.459 R9.2@674.874,309.298 R9.2@674.874,360.136 U1.1@513.459,101.919 U1.1@513.459,152.757 U1.1@513.459,203.596 U1.1@513.459,254.435 U1.1@513.459,305.273 U1.1@513.459,356.112 U1.1@552.613,101.919 U1.1@552.613,152.757 U1.1@552.613,203.596 U1.1@552.613,254.435 U1.1@552.613,305.273 U1.1@552.613,356.112 U1.1@591.768,101.919 U1.1@591.768,203.596 U1.1@591.768,254.435 U1.1@591.768,305.273 U1.1@591.768,356.112 U1.1@630.923,101.919 U1.1@630.923,152.757 U1.1@630.923,203.596 U1.1@630.923,254.435 U1.1@630.923,305.273 U1.1@630.923,356.112 U1.1@670.077,101.919 U1.1@670.077,152.757 U1.1@670.077,203.596 U1.1@670.077,254.435 U1.1@670.077,305.273 U1.1@670.077,356.112 U1.2@513.459,100.649 U1.2@513.459,151.487 U1.2@513.459,202.326 U1.2@513.459,253.165 U1.2@513.459,304.003 U1.2@513.459,354.842 U1.2@552.613,100.649 U1.2@552.613,151.487 U1.2@552.613,202.326 U1.2@552.613,253.165 U1.2@552.613,304.003 U1.2@552.613,354.842 U1.2@591.768,100.649 U1.2@591.768,202.326 U1.2@591.768,253.165 U1.2@591.768,304.003 U1.2@591.768,354.842 U1.2@630.923,100.649 U1.2@630.923,151.487 U1.2@630.923,202.326 U1.2@630.923,253.165 U1.2@630.923,304.003 U1.2@630.923,354.842 U1.2@670.077,100.649 U1.2@670.077,151.487 U1.2@670.077,202.326 U1.2@670.077,253.165 U1.2@670.077,304.003 U1.2@670.077,354.842 U1.3@513.459,99.379 U1.3@513.459,150.217 U1.3@513.459,201.056 U1.3@513.459,251.895 U1.3@513.459,302.733 U1.3@513.459,353.572 U1.3@552.613,99.379 U1.3@552.613,150.217 U1.3@552.613,201.056 U1.3@552.613,251.895 U1.3@552.613,302.733 U1.3@552.613,353.572 U1.3@591.768,99.379 U1.3@591.768,201.056 U1.3@591.768,251.895 U1.3@591.768,302.733 U1.3@591.768,353.572 U1.3@630.923,99.379 U1.3@630.923,150.217 U1.3@630.923,201.056 U1.3@630.923,251.895 U1.3@630.923,302.733 U1.3@630.923,353.572 U1.3@670.077,99.379 U1.3@670.077,150.217 U1.3@670.077,201.056 U1.3@670.077,251.895 U1.3@670.077,302.733 U1.3@670.077,353.572 U1.4@513.459,98.109 U1.4@513.459,148.947 U1.4@513.459,199.786 U1.4@513.459,250.625 U1.4@513.459,301.463 U1.4@513.459,352.302 U1.4@552.613,98.109 U1.4@552.613,148.947 U1.4@552.613,199.786 U1.4@552.613,250.625 U1.4@552.613,301.463 U1.4@552.613,352.302 U1.4@591.768,98.109 U1.4@591.768,199.786 U1.4@591.768,250.625 U1.4@591.768,301.463 U1.4@591.768,352.302 U1.4@630.923,98.109 U1.4@630.923,148.947 U1.4@630.923,199.786 U1.4@630.923,250.625 U1.4@630.923,301.463 U1.4@630.923,352.302 U1.4@670.077,98.109 U1.4@670.077,148.947 U1.4@670.077,199.786 U1.4@670.077,250.625 U1.4@670.077,301.463 U1.4@670.077,352.302 U1.5@520.259,98.109 U1.5@520.259,148.947 U1.5@520.259,199.786 U1.5@520.259,250.625 U1.5@520.259,301.463 U1.5@520.259,352.302 U1.5@559.413,98.109 U1.5@559.413,148.947 U1.5@559.413,199.786 U1.5@559.413,250.625 U1.5@559.413,301.463 U1.5@559.413,352.302 U1.5@598.568,98.109 U1.5@598.568,199.786 U1.5@598.568,250.625 U1.5@598.568,301.463 U1.5@598.568,352.302 U1.5@637.723,98.109 U1.5@637.723,148.947 U1.5@637.723,199.786 U1.5@637.723,250.625 U1.5@637.723,301.463 U1.5@637.723,352.302 U1.5@676.877,98.109 U1.5@676.877,148.947 U1.5@676.877,199.786 U1.5@676.877,250.625 U1.5@676.877,301.463 U1.5@676.877,352.302 U1.6@520.259,99.379 U1.6@520.259,150.217 U1.6@520.259,201.056 U1.6@520.259,251.895 U1.6@520.259,302.733 U1.6@520.259,353.572 U1.6@559.413,99.379 U1.6@559.413,150.217 U1.6@559.413,201.056 U1.6@559.413,251.895 U1.6@559.413,302.733 U1.6@559.413,353.572 U1.6@598.568,99.379 U1.6@598.568,201.056 U1.6@598.568,251.895 U1.6@598.568,302.733 U1.6@598.568,353.572 U1.6@637.723,99.379 U1.6@637.723,150.217 U1.6@637.723,201.056 U1.6@637.723,251.895 U1.6@637.723,302.733 U1.6@637.723,353.572 U1.6@676.877,99.379 U1.6@676.877,150.217 U1.6@676.877,201.056 U1.6@676.877,251.895 U1.6@676.877,302.733 U1.6@676.877,353.572 U1.7@520.259,100.649 U1.7@520.259,151.487 U1.7@520.259,202.326 U1.7@520.259,253.165 U1.7@520.259,304.003 U1.7@520.259,354.842 U1.7@559.413,100.649 U1.7@559.413,151.487 U1.7@559.413,202.326 U1.7@559.413,253.165 U1.7@559.413,304.003 U1.7@559.413,354.842 U1.7@598.568,100.649 U1.7@598.568,202.326 U1.7@598.568,253.165 U1.7@598.568,304.003 U1.7@598.568,354.842 U1.7@637.723,100.649 U1.7@637.723,151.487 U1.7@637.723,202.326 U1.7@637.723,253.165 U1.7@637.723,304.003 U1.7@637.723,354.842 U1.7@676.877,100.649 U1.7@676.877,151.487 U1.7@676.877,202.326 U1.7@676.877,253.165 U1.7@676.877,304.003 U1.7@676.877,354.842 U1.8@520.259,101.919 U1.8@520.259,152.757 U1.8@520.259,203.596 U1.8@520.259,254.435 U1.8@520.259,305.273 U1.8@520.259,356.112 U1.8@559.413,101.919 U1.8@559.413,152.757 U1.8@559.413,203.596 U1.8@559.413,254.435 U1.8@559.413,305.273 U1.8@559.413,356.112 U1.8@598.568,101.919 U1.8@598.568,203.596 U1.8@598.568,254.435 U1.8@598.568,305.273 U1.8@598.568,356.112 U1.8@637.723,101.919 U1.8@637.723,152.757 U1.8@637.723,203.596 U1.8@637.723,254.435 U1.8@637.723,305.273 U1.8@637.723,356.112 U1.8@676.877,101.919 U1.8@676.877,152.757 U1.8@676.877,203.596 U1.8@676.877,254.435 U1.8@676.877,305.273 U1.8@676.877,356.112 U2.1@505.048,112.569 U2.1@505.048,163.407 U2.1@505.048,214.246 U2.1@505.048,265.085 U2.1@505.048,315.923 U2.1@505.048,366.762 U2.1@544.202,112.569 U2.1@544.202,163.407 U2.1@544.202,214.246 U2.1@544.202,265.085 U2.1@544.202,315.923 U2.1@544.202,366.762 U2.1@583.357,112.569 U2.1@583.357,214.246 U2.1@583.357,265.085 U2.1@583.357,315.923 U2.1@583.357,366.762 U2.1@622.512,112.569 U2.1@622.512,163.407 U2.1@622.512,214.246 U2.1@622.512,265.085 U2.1@622.512,315.923 U2.1@622.512,366.762 U2.1@661.666,112.569 U2.1@661.666,163.407 U2.1@661.666,214.246 U2.1@661.666,265.085 U2.1@661.666,315.923 U2.1@661.666,366.762 U2.2@507.588,112.569 U2.2@507.588,163.407 U2.2@507.588,214.246 U2.2@507.588,265.085 U2.2@507.588,315.923 U2.2@507.588,366.762 U2.2@546.742,112.569 U2.2@546.742,163.407 U2.2@546.742,214.246 U2.2@546.742,265.085 U2.2@546.742,315.923 U2.2@546.742,366.762 U2.2@585.897,112.569 U2.2@585.897,214.246 U2.2@585.897,265.085 U2.2@585.897,315.923 U2.2@585.897,366.762 U2.2@625.052,112.569 U2.2@625.052,163.407 U2.2@625.052,214.246 U2.2@625.052,265.085 U2.2@625.052,315.923 U2.2@625.052,366.762 U2.2@664.206,112.569 U2.2@664.206,163.407 U2.2@664.206,214.246 U2.2@664.206,265.085 U2.2@664.206,315.923 U2.2@664.206,366.762 U2.3 U2.4@510.128,120.969 U2.4@510.128,171.807 U2.4@510.128,222.646 U2.4@510.128,273.485 U2.4@510.128,324.323 U2.4@510.128,375.162 U2.4@549.282,120.969 U2.4@549.282,171.807 U2.4@549.282,222.646 U2.4@549.282,273.485 U2.4@549.282,324.323 U2.4@549.282,375.162 U2.4@588.437,120.969 U2.4@588.437,222.646 U2.4@588.437,273.485 U2.4@588.437,324.323 U2.4@588.437,375.162 U2.4@627.592,120.969 U2.4@627.592,171.807 U2.4@627.592,222.646 U2.4@627.592,273.485 U2.4@627.592,324.323 U2.4@627.592,375.162 U2.4@666.746,120.969 U2.4@666.746,171.807 U2.4@666.746,222.646 U2.4@666.746,273.485 U2.4@666.746,324.323 U2.4@666.746,375.162 U2.5 U2.6@505.048,120.969 U2.6@505.048,171.807 U2.6@505.048,222.646 U2.6@505.048,273.485 U2.6@505.048,324.323 U2.6@505.048,375.162 U2.6@544.202,120.969 U2.6@544.202,171.807 U2.6@544.202,222.646 U2.6@544.202,273.485 U2.6@544.202,324.323 U2.6@544.202,375.162 U2.6@583.357,120.969 U2.6@583.357,222.646 U2.6@583.357,273.485 U2.6@583.357,324.323 U2.6@583.357,375.162 U2.6@622.512,120.969 U2.6@622.512,171.807 U2.6@622.512,222.646 U2.6@622.512,273.485 U2.6@622.512,324.323 U2.6@622.512,375.162 U2.6@661.666,120.969 U2.6@661.666,171.807 U2.6@661.666,222.646 U2.6@661.666,273.485 U2.6@661.666,324.323 U2.6@661.666,375.162 U3.1@518.338,121.837 U3.1@518.338,172.675 U3.1@518.338,223.514 U3.1@518.338,274.353 U3.1@518.338,325.191 U3.1@518.338,376.03 U3.1@557.492,121.837 U3.1@557.492,172.675 U3.1@557.492,223.514 U3.1@557.492,274.353 U3.1@557.492,325.191 U3.1@557.492,376.03 U3.1@596.647,121.837 U3.1@596.647,223.514 U3.1@596.647,274.353 U3.1@596.647,325.191 U3.1@596.647,376.03 U3.1@635.802,121.837 U3.1@635.802,172.675 U3.1@635.802,223.514 U3.1@635.802,274.353 U3.1@635.802,325.191 U3.1@635.802,376.03 U3.1@674.956,121.837 U3.1@674.956,172.675 U3.1@674.956,223.514 U3.1@674.956,274.353 U3.1@674.956,325.191 U3.1@674.956,376.03 U3.2@515.888,121.837 U3.2@515.888,172.675 U3.2@515.888,223.514 U3.2@515.888,274.353 U3.2@515.888,325.191 U3.2@515.888,376.03 U3.2@555.042,121.837 U3.2@555.042,172.675 U3.2@555.042,223.514 U3.2@555.042,274.353 U3.2@555.042,325.191 U3.2@555.042,376.03 U3.2@594.197,121.837 U3.2@594.197,223.514 U3.2@594.197,274.353 U3.2@594.197,325.191 U3.2@594.197,376.03 U3.2@633.352,121.837 U3.2@633.352,172.675 U3.2@633.352,223.514 U3.2@633.352,274.353 U3.2@633.352,325.191 U3.2@633.352,376.03 U3.2@672.506,121.837 U3.2@672.506,172.675 U3.2@672.506,223.514 U3.2@672.506,274.353 U3.2@672.506,325.191 U3.2@672.506,376.03 U3.3@515.888,116.037 U3.3@515.888,166.875 U3.3@515.888,217.714 U3.3@515.888,268.553 U3.3@515.888,319.391 U3.3@515.888,370.23 U3.3@555.042,116.037 U3.3@555.042,166.875 U3.3@555.042,217.714 U3.3@555.042,268.553 U3.3@555.042,319.391 U3.3@555.042,370.23 U3.3@594.197,116.037 U3.3@594.197,217.714 U3.3@594.197,268.553 U3.3@594.197,319.391 U3.3@594.197,370.23 U3.3@633.352,116.037 U3.3@633.352,166.875 U3.3@633.352,217.714 U3.3@633.352,268.553 U3.3@633.352,319.391 U3.3@633.352,370.23 U3.3@672.506,116.037 U3.3@672.506,166.875 U3.3@672.506,217.714 U3.3@672.506,268.553 U3.3@672.506,319.391 U3.3@672.506,370.23 U3.4@518.338,116.037 U3.4@518.338,166.875 U3.4@518.338,217.714 U3.4@518.338,268.553 U3.4@518.338,319.391 U3.4@518.338,370.23 U3.4@557.492,116.037 U3.4@557.492,166.875 U3.4@557.492,217.714 U3.4@557.492,268.553 U3.4@557.492,319.391 U3.4@557.492,370.23 U3.4@596.647,116.037 U3.4@596.647,217.714 U3.4@596.647,268.553 U3.4@596.647,319.391 U3.4@596.647,370.23 U3.4@635.802,116.037 U3.4@635.802,166.875 U3.4@635.802,217.714 U3.4@635.802,268.553 U3.4@635.802,319.391 U3.4@635.802,370.23 U3.4@674.956,116.037 U3.4@674.956,166.875 U3.4@674.956,217.714 U3.4@674.956,268.553 U3.4@674.956,319.391 U3.4@674.956,370.23